# Altium PCB PoHalf-Small.PcbDoc
Units mil, origin at the board's own origin, x right, y up, seen from the top; angles counter-clockwise.
Board outline 7000 x 4500 mil, 2 copper layers (Top Layer, Bottom Layer), stack 33.512 mil thick; 23 components, 103 nets, 130 pads, 3 vias.
Unrouted connection lines stored in the file: 18.
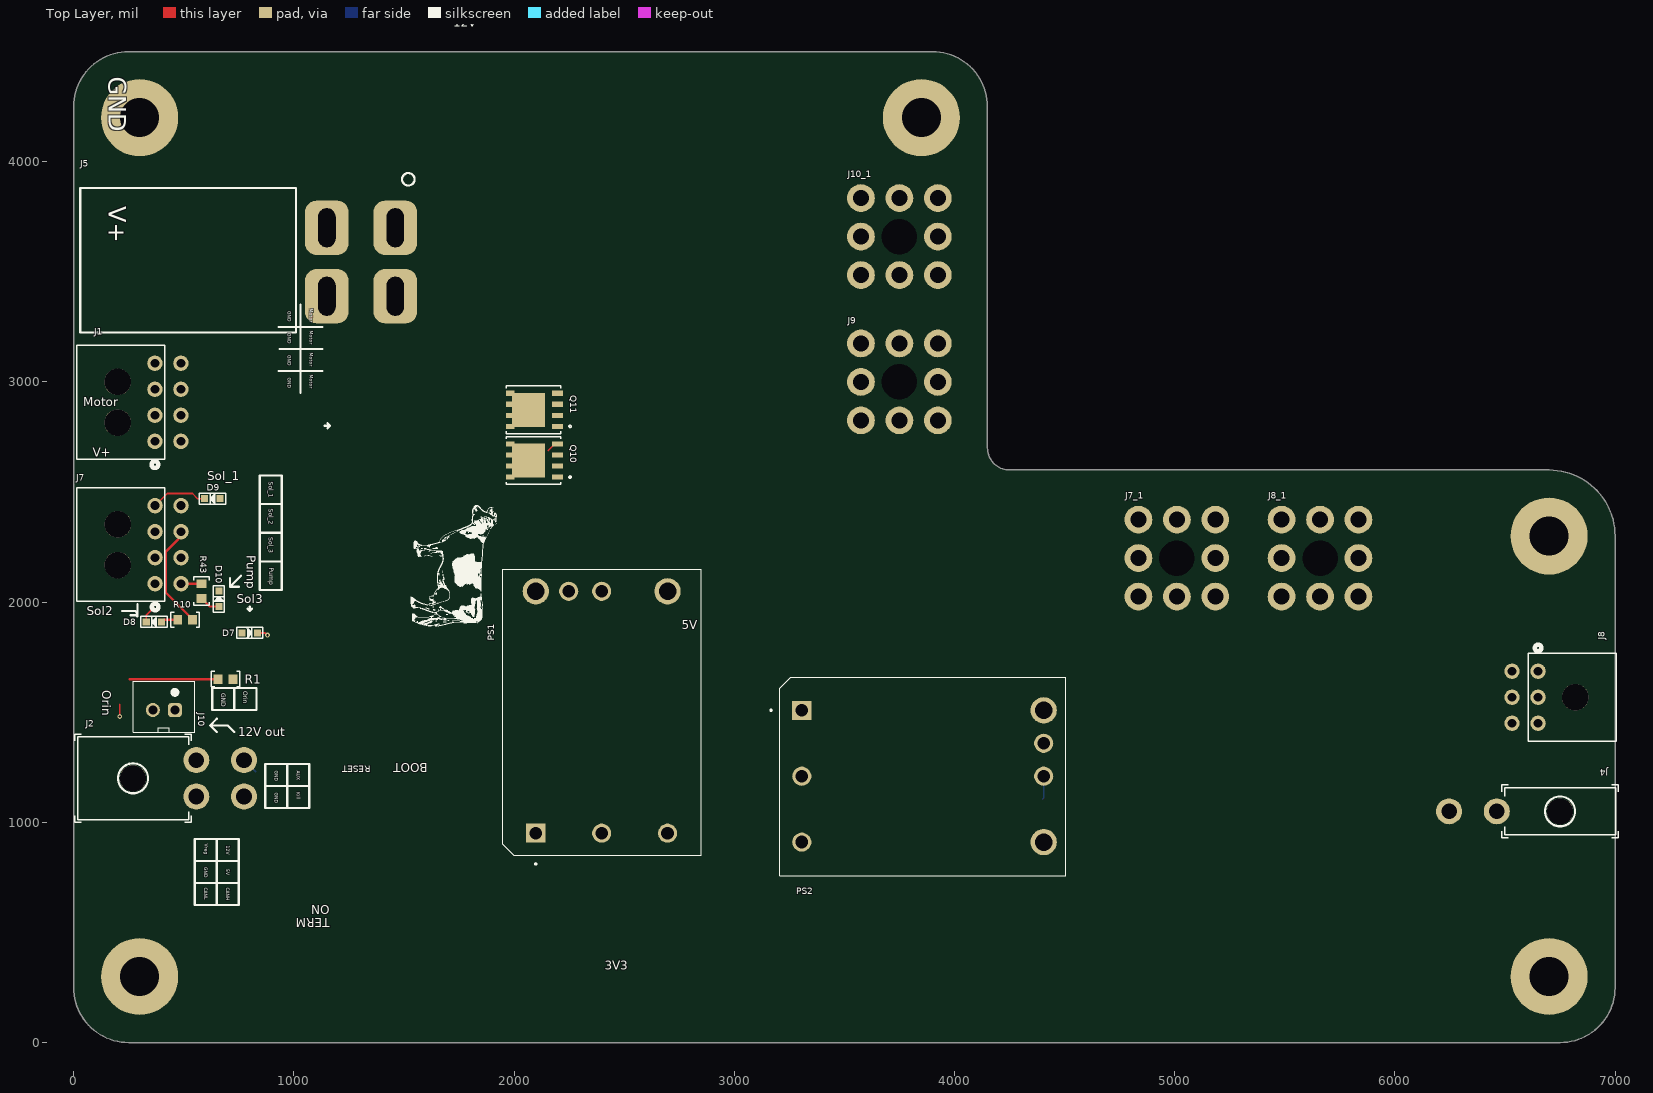
[diagram p0: Top Layer view]
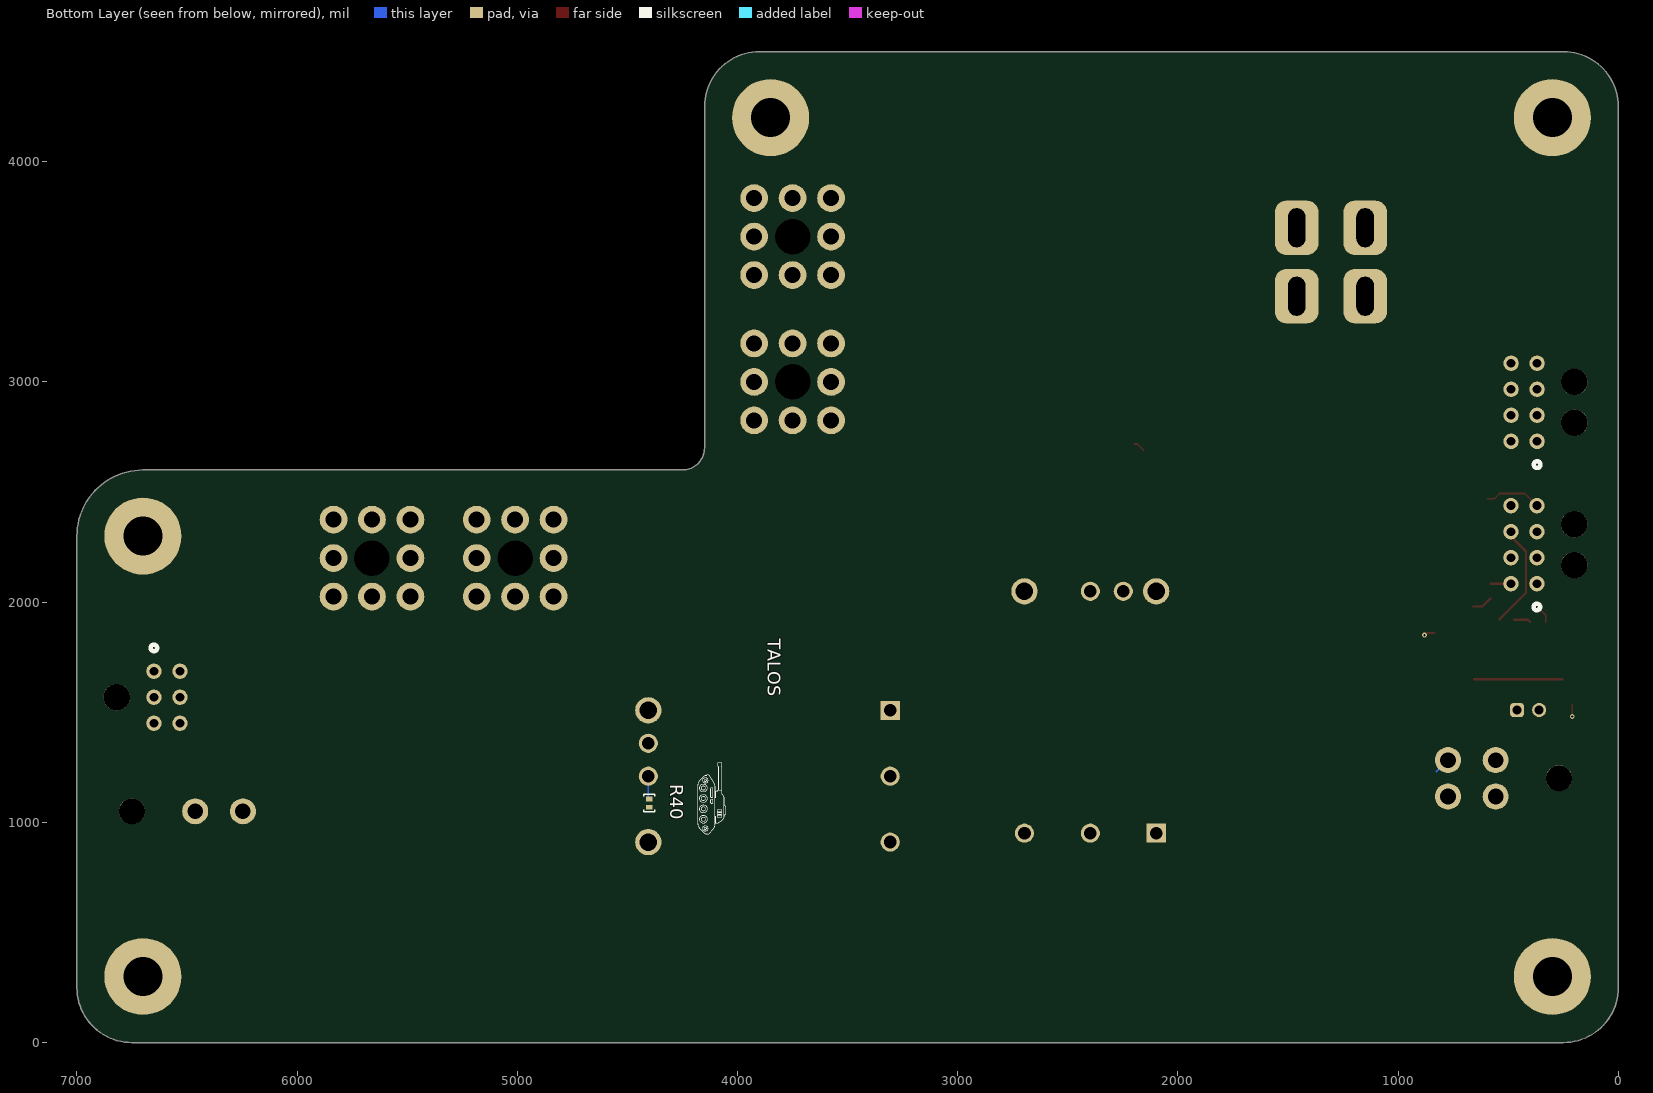
[diagram p1: Bottom Layer view, seen from below]

## Layer stack, top to bottom
Top Solder: solder mask 1, SM-001, Dk 4
Top Layer: signal copper 2.7559
Dielectric 3: core 28, Core-039, Dk 4.8
Bottom Layer: signal copper 2.7559
Bottom Solder: solder mask 1, SM-001, Dk 4

## Board outline
0,250 ccw(c250,250) 250,0 6750,0 ccw(c6750,250) 7000,250 7000,2300 ccw(c6700,2300) 6700,2600 4250,2600 cw(c4250,2700) 4150,2700 4150,4250 ccw(c3900,4250) 3900,4500 250,4500 ccw(c250,4250) 0,4250

## Design rules (kind name [scope] priority, off if disabled: settings)
AcuteAngle [All] p1: minimum=6.00000000000000E+0001 checktracksonly=FALSE
BoardOutlineClearance "BoardOutlineClearance JLCPCB" [All] p1: gap=7.87 ignorepadtopadclearanceinfootprint=FALSE
Clearance "Clearance JLCPCB 4 layer" [All] p1: gap=7.87 ignorepadtopadclearanceinfootprint=FALSE except(5: SMDPad-SMDPad; 6.3: Arc-Arc Arc-Track Arc-SMDPad Track-Track Track-SMDPad; 10: Arc-Hole Track-Hole SMDPad-Hole THPad-Hole Via-Hole Fill-Hole Poly-Hole Region-Hole Text-Hole)
DiffPairsRouting [All] p1: maxlimit=10 minlimit=6 mostfreqgap=8 toplayer_minwidth=3.54 toplayer_maxwidth=15 toplayer_prefwidth=8 bottomlayer_minwidth=3.54 bottomlayer_maxwidth=15 bottomlayer_prefwidth=8 maxuncoupledlength=500
HoleSize "HoleSize JLCPCB Pad" [IsPad] p1: absolutevalues=TRUE maxlimit=248.03 minlimit=19.68 maxpercent=80.000 minpercent=20.000
HoleSize "HoleSize JLCPCB 4 layer" [All] p2: absolutevalues=TRUE maxlimit=248.03 minlimit=7.87 maxpercent=80.000 minpercent=20.000
HoleToHoleClearance "HoleToHoleClearance JLCPCB" [All] p1: gap=10 allowstackedmicrovias=TRUE
MinimumAnnularRing "MinimumAnnularRing JLCPCB Pad" [IsPad] p1: minimumring=11.81
MinimumAnnularRing "MinimumAnnularRing JLCPCB 1oz" [All] p2: minimumring=5.12
MinimumSolderMaskSliver [All] p1: minsoldermaskwidth=1
PlaneConnect [All] p1: pad.planeconnectstyle=Relief pad.reliefexpansion=20 pad.reliefentries=4 pad.reliefconductorwidth=10 pad.reliefairgap=10 via.planeconnectstyle=Direct via.reliefexpansion=20 via.reliefentries=4 via.reliefconductorwidth=10 via.reliefairgap=10
PolygonConnect [All] p1: connectstyle=Direct reliefconductorwidth=15 reliefentries=4 polygonreliefangle="45 Angle" airgapwidth=10
RoutingVias "RoutingVias JLCPCB 4 layer" [All] p1: holewidth=19.68 width=39.37 viastyle="Through Hole" minholewidth=7.87 minwidth=15.75 maxholewidth=50 maxwidth=80
SilkToSilkClearance [All] p1: silktosilkclearance=3
SilkToSolderMaskClearance "SilkToSolderMaskClearance JLCPCB" [IsPad] p1: minsilkscreentomaskgap=5.91 clearancetoexposedcopper=TRUE
SolderMaskExpansion "SolderMaskExpansion JLCPCB" [All] p1: expansion=1.97 istentingtop=FALSE
SupplyNets "Schematic Supply Nets_2" [InNet('MOTOR_PWR')] p1: voltage=0.000
SupplyNets "Schematic Supply Nets_7" [InNet('5v')] p2: voltage=0.000
SupplyNets "Schematic Supply Nets_6" [InNet('V+')] p3: voltage=0.000
SupplyNets "Schematic Supply Nets_5" [InNet('Vreg')] p4: voltage=0.000
SupplyNets "Schematic Supply Nets_4" [InNet('12V')] p5: voltage=0.000
SupplyNets "Schematic Supply Nets_1" [InNet('3V3_RP2CAN')] p6: voltage=0.000
SupplyNets "Schematic Supply Nets" [InNet('GND')] p7: voltage=0.000
Width "Width JLCPCB 4 layer" [All] p1: maxlimit=196.85 minlimit=3.54 preferedwidth=9.84 minimp=50.000000 maximp=50.000000 favimp=50.000000
23 further rules are at their usual default settings.

## Classes and differential pairs
component class U_PD_MK2_Power: PS1 PS2 R40
component class U_PD_MK2_Killswitch: Q10 Q11
component class Connector: D7 D8 D9 D10 J1 J7 J8 J10 R1 R10 R43
differential pair class "USB 2.0": USB USB_RP2040
differential pair USB: +USB_P -USB_N
differential pair USB_RP2040: +USB_RP2040_P -USB_RP2040_N

## Components (designator, comment, footprint, x,y, rotation, side; value= is the part's Value field where it differs from the comment)
D7 "IN-S63AT5G" LED_0603 800,1860 r0 top
D8 "IN-S63AT5G" LED_0603 365,1910 r180 top
D9 "IN-S63AT5G" LED_0603 630,2470 r180 top
D10 "IN-S63AT5G" LED_0603 660,2015 r90 top
J1 "Microfit+ R/A" CONN_MOLEX_MICROFIT+_8POS_R/A#1 369.29,2730.32 r270 top
J2 "Mini-Fit Jr R/A" "CONN_MOLEX_MINIFIT JR_4 POS_R/A" 270,1200 r270 top
J4 "Mini-Fit Jr R/A" "CONN_MOLEX_MINIFIT JR_2 POS_R/A" 6750,1050 r90 top
J5 "PP45 R/A" "CONN_ANDERSON_PP45_4 POS_R/A" 1150,3700 r270 top (schematic designator J4)
J7 "Microfit+ R/A" CONN_MOLEX_MICROFIT+_8POS_R/A#2 370,2083.78 r270 top
J7_1 "Redcube M4 Term 85A" "Redcube M4 Term 85A" 5010,2200 r0 top (schematic designator J7)
J8 "Microfit+ R/A" CONN_MOLEX_MICROFIT_6_POS_R/A 6650,1568.11 r90 top
J8_1 "Redcube M4 Term 85A" "Redcube M4 Term 85A" 5660,2200 r0 top (schematic designator J8)
J9 "Redcube M4 Term 85A" "Redcube M4 Term 85A" 3750,3000 r90 top
J10 "XH2.54 VERT" CONN_JST_XH254_2POS_VERT 460,1510 r180 top
J10_1 "Redcube M4 Term 85A" "Redcube M4 Term 85A" 3750,3660 r90 top (schematic designator J10)
PS1 "I6A4W020A033V-001-R" CONV_I6A4W020A033V-001-R 2400,1500 r90 top
PS2 "I6A4W020A033V-001-R" CONV_I6A4W020A033V-001-R 3856,1207.5 r0 top
Q10 "SIR167DP-T1-GE3" MOSFET_7DP-T1-GE3_VIS 2090,2642.92 r180 top
Q11 "SIR167DP-T1-GE3" MOSFET_7DP-T1-GE3_VIS 2090,2872.92 r180 top
R1 "4.7k Ohm 5% 1/10W" RESISTOR_0603 690,1650 r0 top
R10 "4.7k Ohm 5% 1/10W" RESISTOR_0603 506.5,1920 r0 top
R40 "RES 8.56K OHM 1% 1/16W 0402" RESISTOR_0402 4401,1087.5 r270 bottom
R43 "4.7k Ohm 5% 1/10W" RESISTOR_0603 580,2050 r90 top

## Footprints (in the part's own frame and the unit in brackets; to place one, negate y for a bottom-side part, rotate by r counter-clockwise, add the part's x,y. Pads: shape width x height; smd on the part's side, far side on the other; paste and mask are expansions set on the pad)
"CONN_ANDERSON_PP45_4 POS_R/A" [mm] "Anderson Powerpole45 2x2 Red/Black"
  rrect50% 6.25x5 hole 2 slot 4.5 at 0 deg: 1(0,7.9) 2(7.9,7.9) 3(0,0) 4(7.9,0)
  silkscreen extent -6.31,-28.45 12.07,10.12, body extent -4.32,-28.26 11.84,8.45, height 16.17
CONN_JST_XH254_2POS_VERT [mm] "JST XH 2.54mm Pitch 2 Pos Vertical"
  rrect50% 1.62x1.62 hole 1.02: 1(0,0)
  round 1.62 hole 1.02: 2(2.54,0)
  silkscreen extent -2.29,-3.3 4.83,2.54, body extent -2.34,-3.35 4.88,2.49, height 7.21
CONN_MOLEX_MICROFIT+_8POS_R/A#1 [mil] "MICROFIT+ 212528"
  round 70 hole 40 paste-99999 mask+0: 1(0,0) 2(-118.11,0) 3(-236.22,0) 4(-354.33,0) 5(0,118.11) 6(-118.11,118.11) 7(-236.22,118.11) 8(-354.33,118.11)
  round 120 / inner round 60 / far side round 120 hole 120 unplated paste-99999 mask-60: 9(-269.68,-169.29) 10(-84.65,-169.29)
  silkscreen extent -435,-355 121,45, body extent -431,-351 75,131, height 325
CONN_MOLEX_MICROFIT+_8POS_R/A#2 [mil] "MICROFIT+ 212528"
  round 70 / inner oval 60x70 / far side round 70 hole 40 paste-99999 mask+0: 1(0,0) 2(-118.11,0) 3(-236.22,0) 4(-354.33,0) 5(0,118.11) 6(-118.11,118.11) 7(-236.22,118.11) 8(-354.33,118.11)
  round 120 / inner round 60 / far side round 120 hole 120 unplated paste-99999 mask-60: 9(-269.68,-169.29) 10(-84.65,-169.29)
  silkscreen extent -435,-355 121,45, body extent -431,-351 75,131, height 325
CONN_MOLEX_MICROFIT_6_POS_R/A [mil] "CONN HEADER R/A 6POS 3MM"
  round 70 hole 40 paste-99999 mask+0: 1(118.11,0) 2(0,0) 3(-118.11,0) 4(118.11,118.11) 5(0,118.11) 6(-118.11,118.11)
  round 120 / inner round 60 / far side round 120 hole 120 unplated paste-99999 mask-60: 7(0,-169.29)
  silkscreen extent -199,-355 239,45, body extent -194,-353 194,129, height 325
"CONN_MOLEX_MINIFIT JR_2 POS_R/A" [mm] "Molex Minifit Jr 5569 2 Pos R/A"
  round 3 hole 1.8: 1(0,7.3) 2(0,12.8)
  round 3 hole 3 unplated mask+0: ""(0,0)
  silkscreen extent -3.05,-6.73 3.05,6.73, body extent -2.7,-6.6 3.1,13.34, height 11.4
"CONN_MOLEX_MINIFIT JR_4 POS_R/A" [mm] "Molex Minifit Jr 5569 4 Pos R/A"
  round 3 hole 1.8: 1(2.1,7.3) 2(-2.1,7.3) 3(2.1,12.8) 4(-2.1,12.8)
  round 3 hole 3 unplated mask+0: ""(0,0)
  silkscreen extent -5.08,-6.73 5.08,6.73, body extent -4.8,-6.5 5.2,13.44, height 11.4
CONV_I6A4W020A033V-001-R [mm]
  rect 2.205x2.205 hole 1.47: 1(-13.95,7.65)
  round 2.205 hole 1.47: 2(-13.95,0.05) 3(-13.95,-7.55) 6(13.95,0.05) 7(13.95,3.85)
  round 3.03 hole 2.02: 4(13.95,-7.55) 8(13.95,7.65)
  silkscreen extent -17.6,-11.45 16.5,11.45, body extent -9.53,-11.68 9.53,11.68, height 9.65
LED_0603 [mil] "LED 0603"
  rect 32x32 smd: 1(-35,0) 2(35,0)
  silkscreen extent -60,-25 60,25, body extent -31,-16 32,16, height 28
MOSFET_7DP-T1-GE3_VIS [mil]
  rect 50x24 smd: 1(-107.5,75) 2(-107.5,25) 3(-107.5,-25) 4(-107.5,-75)
  rect 150x154 smd: D(24.5,0)
  rect 40x24 smd: D(107.5,75) D(107.5,-25) D(107.5,25) D(107.5,-75)
  Top Layer region: 1.75,77 1.75,77 1.75,77 1.75,77 1.75,77 1.75,77 1.75,77 1.75,77
  Top Layer region: 1.75,-77 1.75,-77 1.75,-77 1.75,-77 1.75,-77 1.75,-77 1.75,-77 1.75,-77
  silkscreen extent -170,-109 125,109, body extent -121,-101 121,101, height 41
"Redcube M4 Term 85A" [mm]
  round 3.2 hole 1.85: 1(-4.435,-4.435) 1(-4.435,0) 1(-4.435,4.435) 1(0,-4.435) 1(0,4.435) 1(4.435,-4.435) 1(4.435,0) 1(4.435,4.435)
  round 3.2 hole 4.1 unplated: 8(0,0)
  body extent -5,-5 5,5, height 3
RESISTOR_0402 [mm] "Resistor 0402"
  rect 0.55x0.75 smd: 1(-0.475,0) 2(0.475,0)
  silkscreen extent -1.02,-0.64 1.02,0.64, body extent -0.5,-0.25 0.5,0.25, height 0.25
RESISTOR_0603 [mil] "Resistor 0603"
  rect 40x45 smd: 1(-33.5,0) 2(33.5,0)
  silkscreen extent -65,-35 65,35, body extent -31,-16 32,16, height 16

## Part data
D7 D8 D9 D10: library part LED_Green_0603_3V, "LED Green Vf= 3V If = 0.005A / IN-S63AT5G", Color=Green, Forward Current=5mA, Forward Voltage=3V, Package=0603, Supplier Part Number 1=1830-1062-1-ND, ComponentLink1Description=Datasheet, ComponentLink1URL=https://www.we-online.de/katalog/datasheet/150060GS75000.pdf, Made By="Robert Pafford", Supplier 1=Digi-Key
J1 J7: library part CONN_MOLEX_MICROFIT+_8POS_R/A, "Molex Microfit+  / 212528 8 POS R/A Black", Color=Black, Current Rating=12.5A, Manufacturer=Molex, Supplier Part Number 1=900-2125280800-ND, Configuration=R/A, Pitch=3.0mm, Supplier 1=Digikey
J2: library part "CONN_MOLEX_MINIFIT JR_4POS_R/A", "Molex Minifit Jr. 5569  / 4 Pos R/A Natural", Color=Natural, Current Per Pin=13A, Manufacturer=Molex, Supplier Part Number 1=WM13112-ND, ComponentLink1Description=Datasheet, ComponentLink1URL=https://www.molex.com/pdm_docs/sd/026013115_sd.pdf, Configuration="Right Angle", Created By="Flip B", Number of Positions=4, Pitch=4.2mm, Series="Minifit Jr 5569", Supplier 1=Digi-Key
J4: library part "CONN_MOLEX_MINIFIT JR_2POS_R/A", "Molex Minifit Jr. 5569  / 2 Pos R/A Natural", Color=Natural, Current Per Pin=13A, Manufacturer=Molex, Supplier Part Number 1=WM1351-ND, ComponentLink1Description=Datasheet, ComponentLink1URL=https://www.molex.com/pdm_docs/sd/026013115_sd.pdf, Configuration="Right Angle", Created By="Robert P", Number of Positions=2, Pitch=4.2mm, Series="Minifit Jr 5569", Supplier 1=Digi-Key
J5: library part CONN_ANDERSON_2x2_R/A, "Anderson PP45 / 4 Pos R/A Red/Black", Color=Red/Black, Current Per Pin=45A, Manufacturer=Anderson, Supplier Part Number 1=2243-1337G1-ND, ComponentLink1Description=Datasheet, ComponentLink1URL=https://www.andersonpower.com/content/dam/app/ecommerce/product-pdfs/DS-PP1545.pdf, Configuration="Right Angle", Created By="Flip B", Number of Positions=4, Pitch=7.9mm, Series="PowerPole 45", Supplier 1=Digi-Key, Supplier 2=Digi-Key, Supplier 3=Digi-Key, Supplier 4=Digi-Key, Supplier Part Number 2=2243-1336G1-ND, Supplier Part Number 3=2243-1327-BK-ND, Supplier Part Number 4=A102007-ND
J7_1 J8_1 J9 J10_1: Current Rating="85 A", Created By="Nahtan Ayer", Screw Size=M4
J8: library part CONN_MOLEX_MICROFIT+_6POS_R/A, "Molex Microfit+  / 212528 6 POS R/A Black", Color=Black, Current Per Pin=12.5, Manufacturer=Molex, Supplier Part Number 1=900-2125280600-ND, Configuration=R/A, Pitch=3.0mm, Supplier 1=Digikey
J10: library part CONN_JST_XH254_2POS_VERT, "JST XH 2.54mm Pitch 2 Pos Vertical", Color=White, Current Per Pin=4A, Manufacturer=JST, ComponentLink1Description="Purchase Link", ComponentLink1URL=https://www.amazon.com/460PCS-XH2-54-Connector-Terminal-Connectors/dp/B09DBGVX5C, Configuration=Vertical, Created By="Robert P", NOTE="Do not use JST 2.5mm parts with this footprint. JST does not make 2.54mm pitch pins, rather only clones make this connector!", Number of Positions=2, Pitch=2.54mm, Series="XH 2.54"
PS1 PS2: "Non-Isolated PoL Module DC DC Converter 1 Output 3.3 ~ 15V 20A 9V - 53V Input", Package="DIP-8 TDK-Lambda", Availability="In Stock", Check_prices=https://www.snapeda.com/parts/I6A4W020A033V-001-R/TDK-Lambda%20Americas%20Inc./view-part/1737324/?ref=eda, MF="TDK-Lambda Americas", MP=I6A4W020A033V-001-R, Price=None, Purchase-URL=https://pricing.snapeda.com/search/part/I6A4W020A033V-001-R/?ref=eda, SnapEDA_Link=https://www.snapeda.com/parts/I6A4W020A033V-001-R/TDK-Lambda%20Americas%20Inc./view-part/1737324/?ref=snap
Q10 Q11: "P-Channel 30 V 60A (Tc) 65.8W (Tc) Surface Mount PowerPAK® SO-8", Mfr_Name=Vishay, Supplier Part Number 1=78-SIR167DP-T1-GE3, Copyright="Copyright (C) 2022 Ultra Librarian. All rights reserved.", Manufacturer_Part_Number=SIR167DP-T1-GE3, RefDes=RefDes, Supplier 1=Mouser, Type=DEV
R1 R10 R43: library part RESISTOR_4.7K_0603, "RES 4.7k OHM 5% 1/10W 0603", Digikey Part Numer=CR0603-JW-104ELFTR-ND, Supplier Part Number 1=RMCF0603JT4K70CT-ND, Tolerance="+/- 5%", Value  (Ohms)=4.7K, Made By="Robert Pafford", Supplier=Digikey, Supplier 1=Digi-Key, Wattage=1/10W
R40: library part RESISTOR_8.56K_1%_0402, "8.56 kOhms ±1% 0.063W, 1/16W Chip Resistor 0402 (1005 Metric) Automotive AEC-Q200, Moisture Resistant Metal Film", Supplier Part Number 1=2019-RN73H1ETTP8561F50CT-ND, Tolerance="+/- 1%", Value (Ohms)=8.56K, Made By="John Ulm", Supplier 1=Digi-Key, Wattage=1/16W

## Free pads (board coordinates)
  round 350 hole 177 mask-99999: 2(300,300) 2(300,4200) 2(3850,4200) 2(6700,300) 2(6700,2300)

## Via types
v1: diameter 22, hole 10, Top Layer to Bottom Layer, tented both sides, 3 vias

## Nets (pads, with @x,y where several pads share a name; then routed paths per layer and width w, separated by ;. In a path a pad name is that pad's centre, name@x,y a point inside that pad or via, vN(x,y) a via of type N, cw(c..) or ccw(c..) an arc to the next point about the centre after c; other vN are vias at no path point)
1v1_RP2040: 
3V3_MEAS: 
3V3_RP2CAN: 
5V: J8.5 PS2.7 PS2.8
5V_MEAS: 
12V: J8.6 J10.1 PS1.7 PS1.8
12V_MEAS: 
ADC0: 
ADC1: 
AUX_SWITCH: J2.4 | length 74.2
  Bottom Layer w7.87: J2.4 826.42,1230.19
CANCLK_RP2CAN: 
CANH: J8.4
CANL: J8.1
CANRX_RP2CAN: 
CANTX_RP2CAN: 
DBG_TX_RP2040: 
GND: D7.2 D8.2 D9.2 D10.2 J1.1 J1.2 J1.3 J1.4 J2.1 J2.2 J4.1 J7.1 J7.2 J7.3 J7.4 J8.2 J10.2 PS1.2 PS1.3 PS1.4 PS2.2 PS2.3 PS2.4 R40.2 | length 433.8
  Top Layer w7.87: v1(210,1480) 210,1535 ; D8.2 330,1940 v1(360,1970) ; J7.4 424.89,2493 540,2493 563,2470 D9.2 ; D7.2 870,1860 v1(880,1850)
INT_RP2CAN: 
KILL_FEEDBACK: 
KILL_SWITCH: J2.3
LEDB_RP2CAN: 
LEDG_RP2CAN: 
LEDR_RP2CAN: 
MISO_RP2CAN: 
MOSI_RP2CAN: 
MOTOR_EN: 
mOTOR_PWR: J1.5 J1.6 J1.7 J1.8 Q10.D Q11.D
nCS_RP2CAN: 
NetC1_1: 
NetC2C_2: 
NetC2R_1: 
NetD1_1: R1.1 | length 401.5
  Top Layer w9.84: 255,1650 R1.1
NetD1C_1: 
NetD1C_2: 
NetD1C_3: 
NetD2_1: 
NetD3_1: 
NetD4_1: 
NetD5_1: 
NetD6_1: 
NetD7_1: D7.1
NetD8_1: D8.1 R10.1 | length 77.1
  Top Layer w10: D8.1 410,1920 R10.1
NetD9_1: D9.1
NetD10_1: D10.1 R43.1 | length 95.1
  Top Layer w10: R43.1 582.5,2016.5 619,1980 D10.1
NetD11_1: 
NetPS1_6: PS1.6
NetPS2_6: PS2.6 R40.1 | length 125
  Bottom Layer w7.87: R40.1 4405.21,1110.41 PS2.6@4405.21,1229.47
NetQ1_4: 
NetQ3_4: 
NetQ4_4: 
NetQ5_4: 
NetQ10_4: Q10.4 | length 54.7
  Top Layer w7.87: 2155,2688.42 2184.5,2717.92 Q10.4
NetQ11_4: Q11.4
NetQ12_4: 
NetR2C_1: 
NetR3C_1: 
NetR6C_1: 
NetR6R_1: 
NetR7R_1: 
NetR21_1: 
NetU1R_2: 
NetU1R_3: 
NetU1R_9: 
NetU1R_11: 
Orin_PWR: J4.2 R1.2
Orin_SW: 
Pump_PWR: J7.5 R43.2 | length 92
  Top Layer w10: J7.5 579.72,2083.78 R43.2
Pump_SW: 
QSPI_SCLK_RP2040: 
QSPI_SD0_RP2040: 
QSPI_SD1_RP2040: 
QSPI_SD2_RP2040: 
QSPI_SD3_RP2040: 
QSPI_SS_RP2040: 
RUN_RP2040: 
SCK_RP2CAN: 
SCL_0_1: 
SCL_1: 
SCL_1_0: 
SDA_0_1: 
SDA_1: 
SDA_1_0: 
Sens_0: 
Sens_1: 
SOFTWARE_KILL: 
Solinoid_1_PWR: J7.8
Solinoid_1_SW: 
Solinoid_2_PWR: J7.7 R10.2 | length 477.9
  Top Layer w10: J7.7 476.63,2308.52 476.63,2286.63 420,2230 420,2042.5 540,1922.5 R10.2
Solinoid_2_SW: 
Solinoid_3_PWR: J7.6
Solinoid_3_SW: 
SWCLK_RP2040: 
SWDIO_RP2040: 
TERM_DET_RP2CAN: 
USB_N: 
USB_P: 
USB_RP2040_N: 
USB_RP2040_P: 
V+: Q10.1 Q10.2 Q10.3 Q11.1 Q11.2 Q11.3
Vreg: J8.3 PS1.1 PS2.1
Vreg_MEAS: 
XIN_RP2040: 
XOUT_RP2040: 
pads on no net: J1.9 J1.10 J2. J4. J5.1 J5.2 J5.3 J5.4 J7.9 J7.10 J7_1.1 J7_1.8 J8.7 J8_1.1 J8_1.8 J9.1 J9.8 J10_1.1 J10_1.8

## Silkscreen, mask and mechanical layers (free items; w line width, h text height)
Top Overlay:
  drawing of 101 lines, arcs and shapes, not listed
  text "Vreg" at 568.36,4683.34 h50
  text "12V" at 1724.02,4613.01 h40
  text "GND" at 160.01,4386.12 h80 r270
  text "V+" at 160.01,3796.65 h80 r270
  text "Motor" at 1072.5,3332.49 h15 r270
  text "GND" at 972.5,3319.99 h15 r270
  text "Motor" at 1072.5,3232.49 h15 r270
  text "GND" at 972.5,3219.99 h15 r270
  text "Motor" at 1072.5,3132.49 h15 r270
  text "GND" at 972.5,3119.99 h15 r270
  text "Motor" at 1072.5,3032.49 h15 r270
  text "GND" at 972.5,3019.99 h15 r270
  text "Motor" at 43.36,2890.01 h40
  text "V+" at 86.68,2660.01 h40
  text "Sol_1" at 606.69,2553.34 h40
  text "Sol_1" at 886.67,2546.65 h20 r270
  text "Sol_2" at 886.67,2424.99 h20 r270
  text "Sol_3" at 886.67,2294.99 h20 r270
  text "Pump" at 786.67,2213.31 h40 r270
  text "Pump" at 888.34,2156.65 h20 r270
  text "Sol3" at 740.02,1996.01 h40
  text "Sol2" at 60.02,1940.01 h40
  text "5V" at 2761.68,1877.01 h40
  text "Orin" at 130.01,1599.98 h40 r270
  text "Orin" at 770,1594.99 h20 r270
  text "GND" at 670,1586.66 h20 r270
  text "12V out" at 746.71,1390.01 h40
  text "BOOT" at 1607.72,1267.94 h40 r180
  text "RESET" at 1349.98,1257.94 h30 r180
  text "GND" at 912.5,1234.99 h15 r270
  text "AUX" at 1012.5,1234.99 h15 r270
  text "Kill" at 1012.5,1137.49 h15 r270
  text "GND" at 912.5,1134.99 h15 r270
  text "Vreg" at 595,902.49 h15 r270
  text "12V" at 692.5,893.74 h15 r270
  text "GND" at 592.5,794.99 h15 r270
  text "5V" at 692.5,787.5 h15 r270
  text "CANL" at 592.5,702.49 h15 r270
  text "CANH" at 692.5,702.49 h15 r270
  text "TERM / ON" at 1163.9,623.43 h40 r180
  text "3V3" at 2412.68,330.01 h40
Bottom Overlay:
  drawing of 18 lines, arcs and shapes, not listed
  text "TALOS" at 3882.69,1834.57 h100 r90
Top Solder:
  circle w175: c3850,4200 r87.5
  circle w175: c6700,300 r87.5
  circle w175: c6700,2300 r87.5
  circle w175: c300,300 r87.5
  circle w175: c300,4200 r87.5
Bottom Solder:
  circle w175: c3850,4200 r87.5
  circle w175: c6700,300 r87.5
  circle w175: c6700,2300 r87.5
  circle w175: c300,300 r87.5
  circle w175: c300,4200 r87.5